# EAGLE board PT4115 (EAGLE 7.1.0)
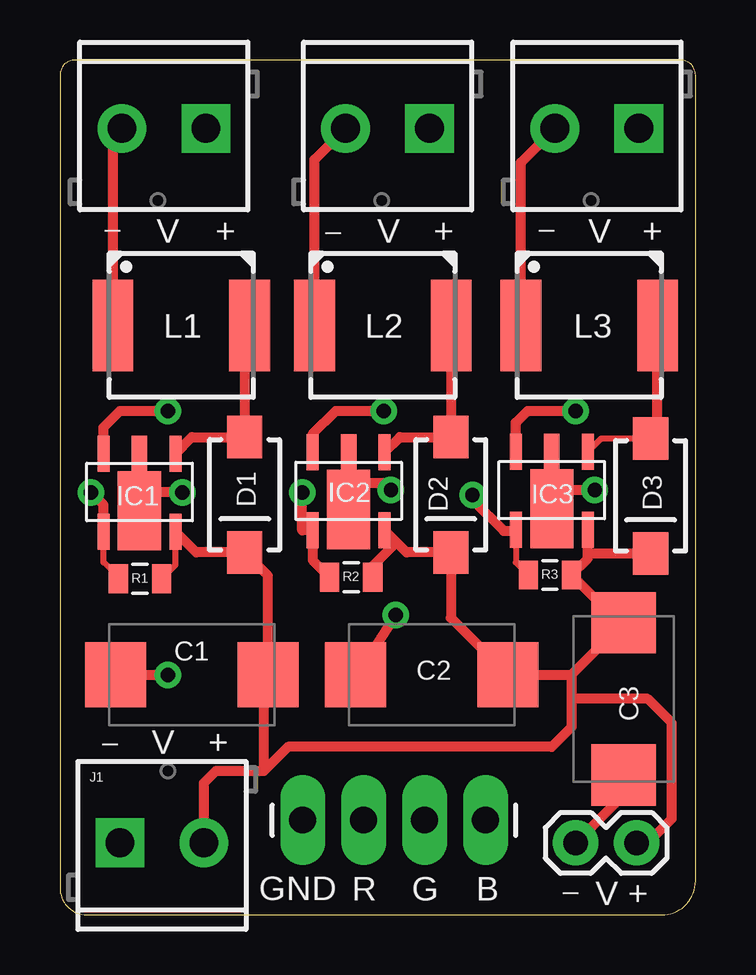
[diagram p0: board, top side]
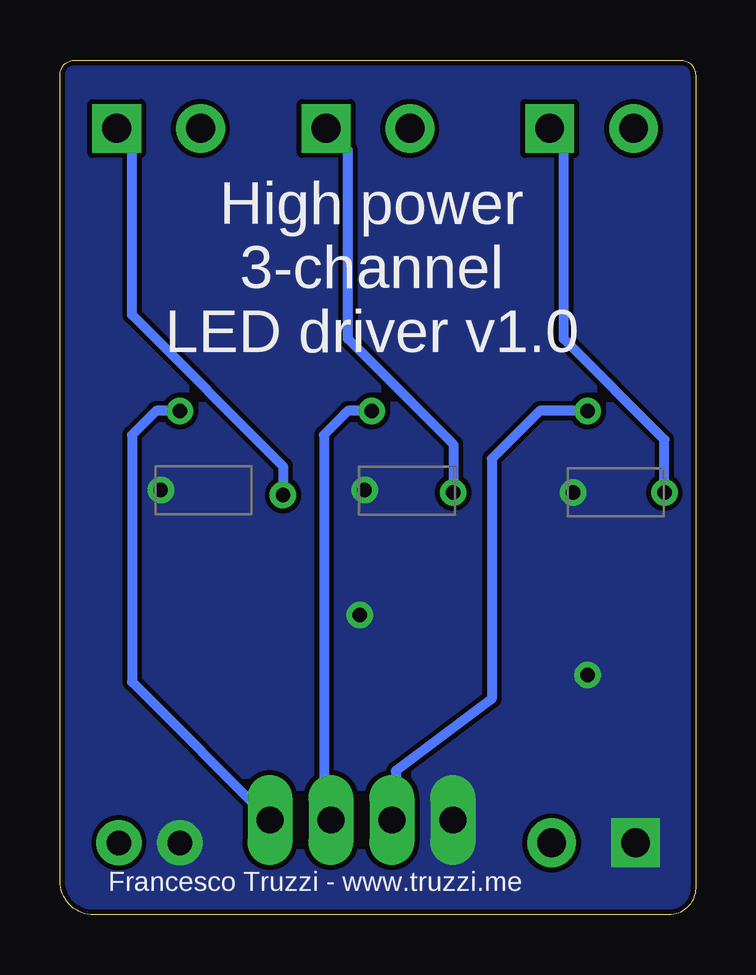
[diagram p1: board, bottom side, seen from below]

Size 26.5 x 35.62 mm. Coordinates in mm from the lower left corner, seen from the top.
Outline: 0,34.99 0,1.12 arc90 1.12,0 25.09,0 arc90 26.5,1.41 26.5,35 arc90 25.88,35.62 0.63,35.62 arc90 0,34.99
Copper layers (1*16): Top 0.035mm / dielectric 1.5mm / Bottom 0.035mm
Design rules "SparkFun": minimum track width 8mil, minimum drill 20mil, track to track 8mil, track to pad 8mil, pad to pad 8mil, via to via 8mil, smd to smd 8mil, copper to edge 8mil, drill to drill 8mil, minimum pad ring 12mil, minimum via ring 10mil, stop-mask expansion 4mil, vias tented up to drill 20mil, thermal gap 10mil

## Footprints (pad centres in the part's own frame; a part is rotated, then mirrored left to right if it is on the bottom)
D/7343-31R = smd 2.55 x 2.7: + 3.175,0; - -3.175,0
SMA-DIODE-KIT = smd 1.77 x 1.47: A -2.4,0; C 2.4,0
PT4115 = smd 0.5 x 1.5: 1 0,0; 3 3,0; 4 3,3.25; 5 0,3.25 | smd 0.65 x 1.5: 2 1.5,0 | smd 1.8 x 3.3: 2A 1.5,2.375
SCREWTERMINAL-3.5MM-2 = drill 1.2 pad 2.032 square: 1 0,0 | drill 1.2 pad 2.032: 2 3.5,0
1X04_LONGPADS = drill 1.118 pad 1.88 long: 1 0,0; 2 2.54,0; 3 5.08,0; 4 7.62,0
1X02 = drill 1.016 pad 1.88: 1 0,0; 2 2.54,0
ELL6 = smd 1.7 x 3.8: 1 -2.85,0; 2 2.85,0
0805 = smd 0.8 x 1.2: 1 -0.9,0; 2 0.9,0

## Placement (x,y rotation side)
C1  [D/7343-31R]  5.5,10 0 top
C2  [D/7343-31R]  15.5,10 0 top
C3  [D/7343-31R]  23.5,9 90 top
D1  [SMA-DIODE-KIT]  7.7,17.5 270 top
D2  [SMA-DIODE-KIT]  16.3,17.5 270 top
D3  [SMA-DIODE-KIT]  24.62,17.46 270 top
IC1  [PT4115]  4.82,19.22 180 top
IC2  [PT4115]  13.54,19.27 180 top
IC3  [PT4115]  22.01,19.3 180 top
J1  M023.5MM  [SCREWTERMINAL-3.5MM-2]  2.5,3 0 top
JP1  M023.5MM  [SCREWTERMINAL-3.5MM-2]  6.08,32.77 180 top
JP2  M023.5MM  [SCREWTERMINAL-3.5MM-2]  15.41,32.77 180 top
JP3  M023.5MM  [SCREWTERMINAL-3.5MM-2]  24.14,32.77 180 top
JP4  [1X04_LONGPADS]  17.74,3.95 180 top
JP5  M02PTH  [1X02]  21.5,3 0 top
L1  ELL6  [ELL6]  5.06,24.56 0 top
L2  ELL6  [ELL6]  13.46,24.56 0 top
L3  ELL6  [ELL6]  22.06,24.56 0 top
R1  0.3  [0805]  3.34,14 0 top
R2  0.3  [0805]  12.14,14.07 0 top
R3  0.3  [0805]  20.43,14.16 0 top

## Library data of the parts
C1-C3 = rcl
D1-D3 = SparkFun-DiscreteSemi
IC1-IC3 = PT4115
J1 JP1-JP5 = SparkFun-Connectors
L1-L3 = inductor-panasonic
R1-R3 = SparkFun-Resistors; PROD_ID: RES-11622

## Nets
B+: IC3.4 JP3.1 R3.1
B-: JP3.2 L3.1
G+: IC2.4 JP2.1 R2.1
G-: JP2.2 L2.1
GND: C1.- C2.- C3.- IC1.2 IC1.2A IC2.2 IC2.2A IC3.2 IC3.2A J1.1 JP4.4 JP5.1
N$2: D1.A IC1.1 L1.2
N$4: D2.A IC2.1 L2.2
N$7: D3.A IC3.1 L3.2
PWM_B: IC3.3 JP4.1
PWM_G: IC2.3 JP4.2
PWM_R: IC1.3 JP4.3
R+: IC1.4 JP1.1 R1.1
R-: JP1.2 L1.1
VCC: C1.+ C2.+ C3.+ D1.C D2.C D3.C IC1.5 IC2.5 IC3.5 J1.2 JP5.2 R1.2 R2.2 R3.2

## Tracks (layer width: path | path; a pad name or v marks a point on that pad's centre or on a via)
B+  (via drill 0.6)
  Top 0.254: IC3.4 19.01,14.68 R3.1
  Top 0.406: v17.2,17.5 17.2,17.3 18.5,16 18.96,16 IC3.4
  Bottom 0.406: JP3.1 23.5,32.13 23.5,25 17.2,18.7 v17.2,17.5
B-
  Top 0.406: L3.1 19.21,31.34 JP3.2
G+  (via drill 0.6)
  Top 0.406: v10.1,17.6 10.1,16.02 IC2.4 10.54,14.78 R2.1
  Bottom 0.406: JP2.1 14.5,31.86 14.5,24 10.1,19.6 v10.1,17.6
G-
  Top 0.406: L2.1 10.61,31.47 JP2.2
GND  (via drill 0.6)
  Top 0.406: C3.- 23.5,5 JP5.1 | v5.1,17.6 4.07,17.6 3.98,17.51 | 3.98,17.51 IC1.2A | IC1.2 3.32,18.18 3.98,17.51 | IC2.2 12.04,18.46 12.5,18 | 12.5,18 13.5,18 v13.8,17.7 | IC2.2A 12.04,17.54 12.5,18 | v22.3,17.7 20.8,17.7 | 20.8,17.7 20.5,18 IC3.2 | 20.8,17.7 20.8,17.22 IC3.2A | C2.- 12.32,9.88 v14,12.5 | C1.- v4.5,10
  pour Bottom (no thermals): 25.09,0 1.17,0 arc-90 0,1.17 0.01,34.81 arc-91 0.79,35.6 25.9,35.6 arc-90 26.5,35 26.5,1.41 arc-90
N$2
  Top 0.406: L1.2 7.7,24.35 D1.A 5.5,19.9 IC1.1
N$4
  Top 0.406: L2.2 16.3,24.55 D2.A 14.17,19.9 IC2.1
N$7
  Top 0.254: IC3.1 22.56,19.86 D3.A
  Top 0.406: D3.A 24.91,20.14 L3.2
PWM_B  (via drill 0.6)
  Top 0.406: IC3.3 19.01,20.51 19.5,21 v21.5,21
  Bottom 0.406: v21.5,21 22.5,21 23.5,20 23.5,9.71 JP4.1
PWM_G  (via drill 0.6)
  Top 0.406: IC2.3 10.54,20.04 11.5,21 v13.5,21
  Bottom 0.406: v13.5,21 14.5,21 15.5,20 15.5,4.25 JP4.2
PWM_R  (via drill 0.6)
  Top 0.406: IC1.3 1.82,20.32 2.5,21 v4.5,21
  Bottom 0.406: v4.5,21 6.5,21 8.5,19 8.5,9 12.5,6 12.5,4.11 JP4.3
R+  (via drill 0.6)
  Top 0.254: R1.1 2.44,14.06 1.82,14.68 IC1.4
  Top 0.406: IC1.4 1.82,17.08 v1.3,17.6
  Bottom 0.406: v1.3,17.6 1.3,19.8 5.5,24 5.5,32.19 JP1.1
R-
  Top 0.406: L1.1 2.21,32.4 JP1.2
VCC
  Top 0.254: R1.2 4.82,14.58 IC1.5
  Top 0.406: 8.5,6 8.5,9.82 C1.+ 8.68,14.12 D1.C 5.68,15.1 IC1.5 | 21.32,10 C2.+ 16.3,12.38 D2.C 14.45,15.1 14.03,15.53 | 21.32,10 C3.+ 23.31,12.18 R3.2 22.01,14.84 22.01,15 | 14.03,15.53 IC2.5 | 22.01,15 IC3.5 | D3.C 22.06,15.06 22.01,15 | 21.32,10 21.32,9 | 21.32,9 21.32,7.83 20.5,7 9.5,7 8.5,6 | JP5.2 24.5,3 25.5,4 25.5,8 24.5,9 21.32,9 | J1.2 6,5.5 6.5,6 8.5,6 | R2.2 13.04,14.54 14.03,15.53

## Text on the board
tPlace: _ | V | + | _ | V | + | _ | V | + | _ | V | + | R | G | B | GND | _ | V | +
bPlace: High power / 3-channel / LED driver v1.0 | Francesco Truzzi - www.truzzi.me